# Altium PCB PCB3.PcbDoc
Units mil, origin at the board's own origin, x right, y up, seen from the top; angles counter-clockwise.
Board outline 4724 x 3937 mil, 2 copper layers (Top Layer, Bottom Layer); 59 components, 93 nets, 309 pads, 46 vias.
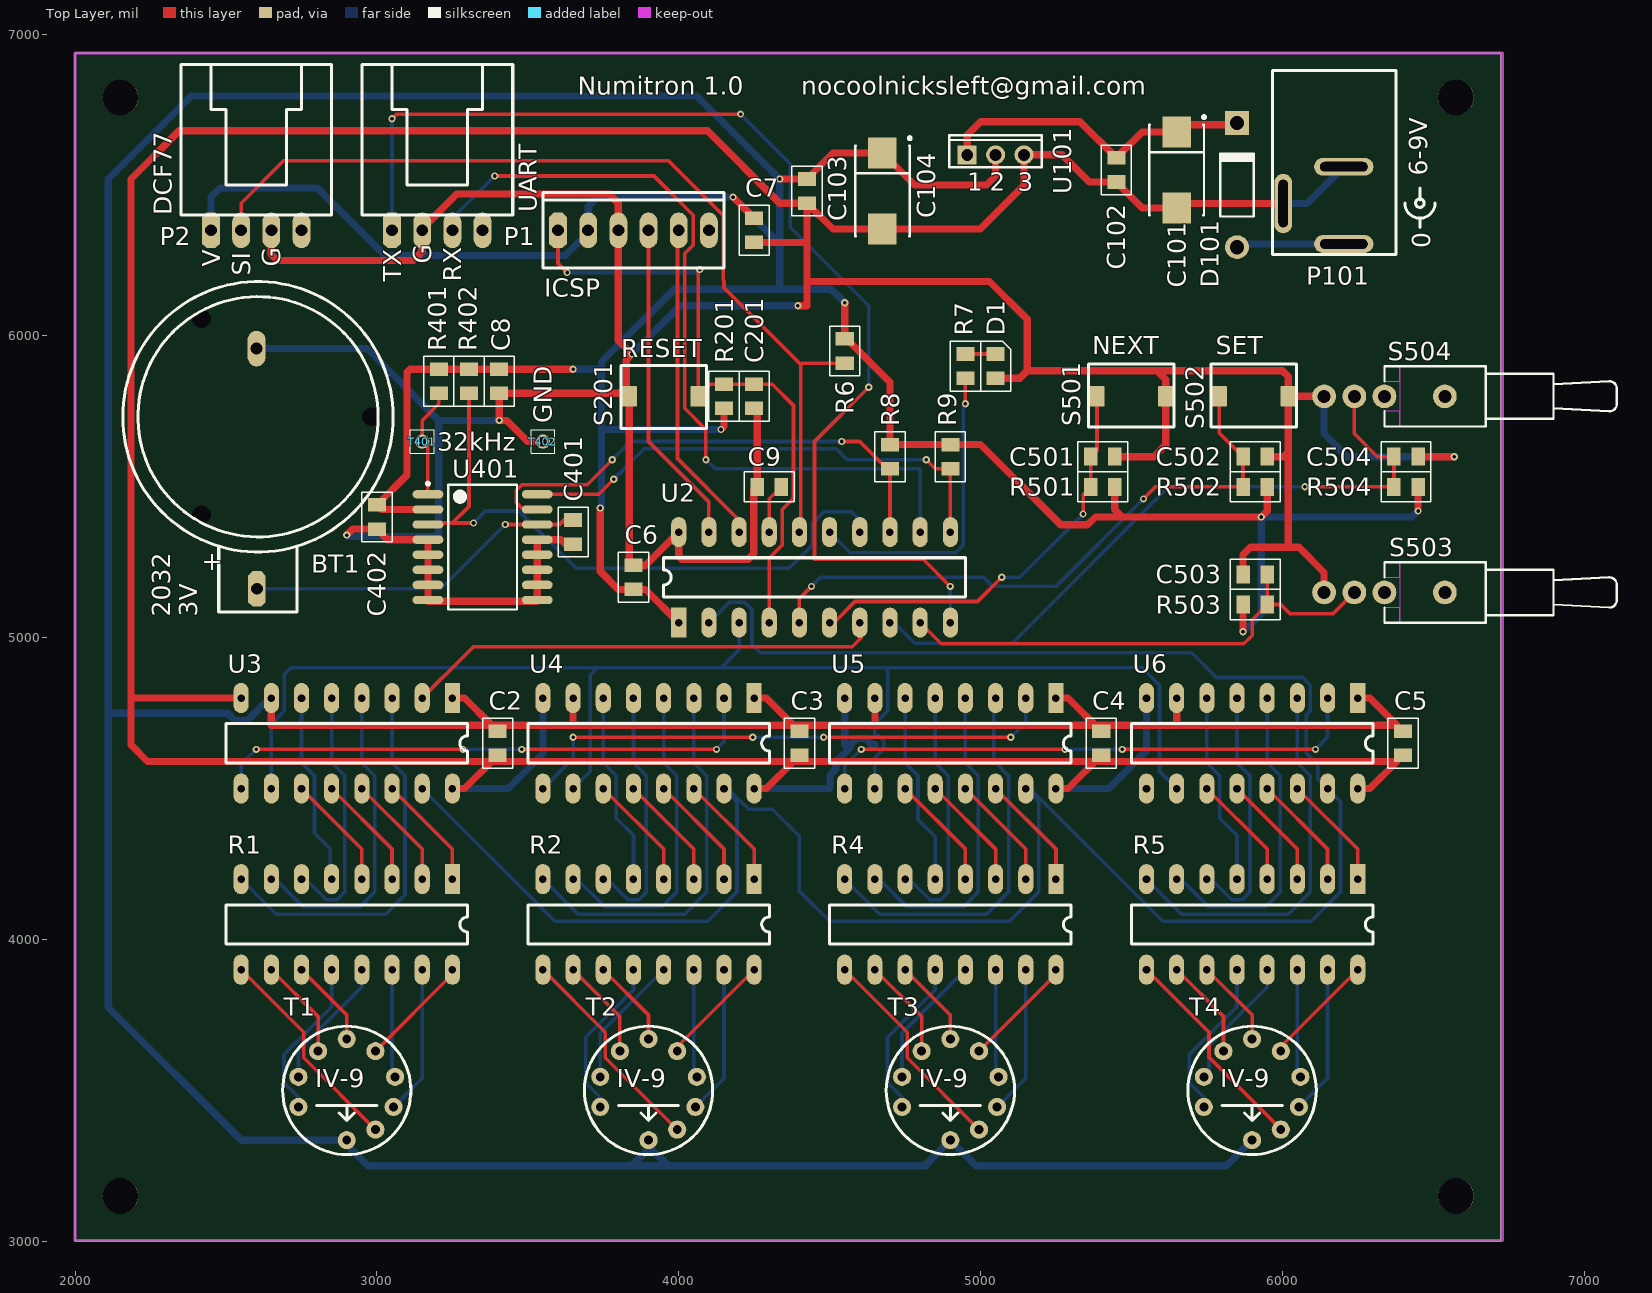
[diagram p0: Top Layer view]
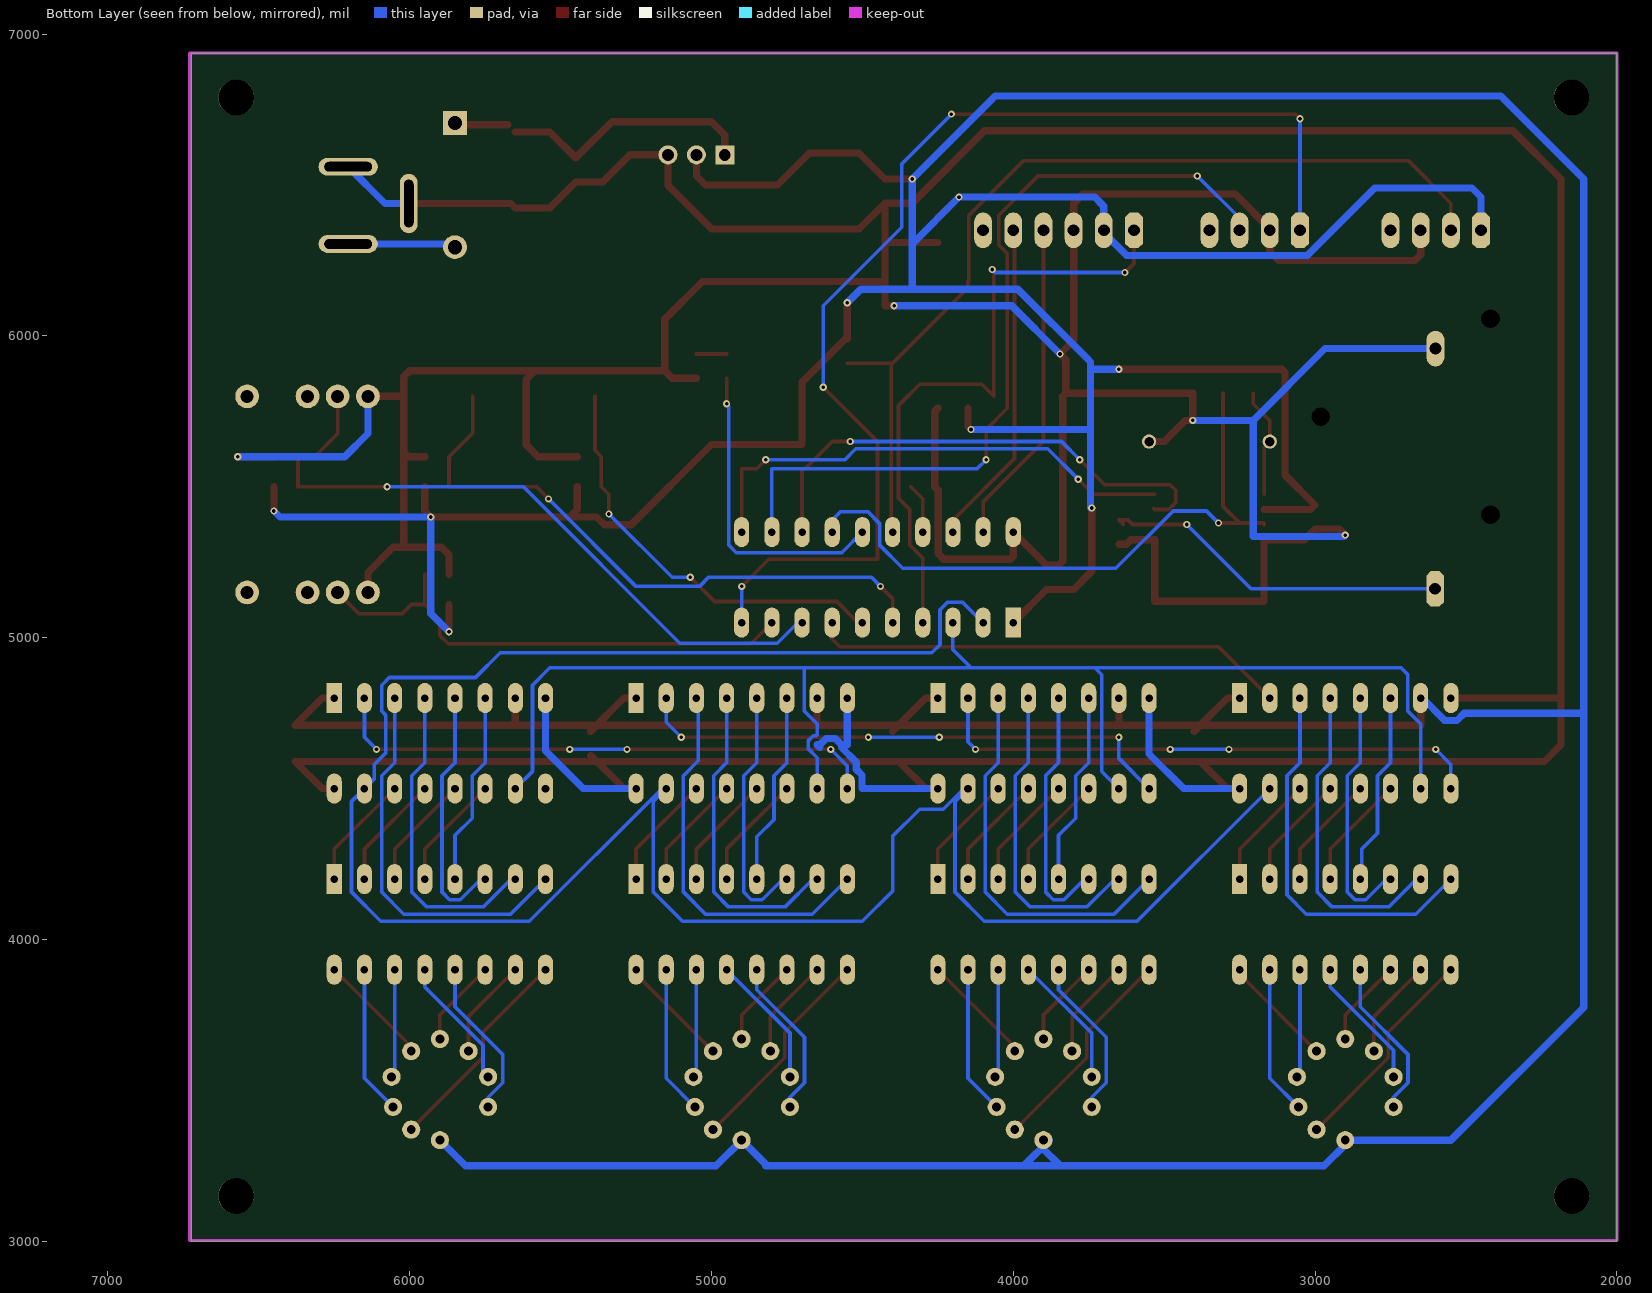
[diagram p1: Bottom Layer view, seen from below]

## Layer stack, top to bottom
Top Layer: signal copper 1.4
Dielectric: dielectric 12.6, FR-4, Dk 4.8
Bottom Layer: signal copper 1.4

## Board outline
2000,3000 6724,3000 6724,6937 2000,6937

## Design rules (kind name [scope] priority, off if disabled: settings)
Clearance [All] p1: gap=12
Height [All] p1: minheight=0 maxheight=2000 prefheight=500
PolygonConnect [All] p1: connectstyle=Relief reliefconductorwidth=10 reliefentries=4 polygonreliefangle="90 Angle"
RoutingVias [All] p1: holewidth=12 width=24 viastyle="Through Hole" minholewidth=12 minwidth=24 maxholewidth=28 maxwidth=50
SilkscreenOverComponentPads [All] p1: minsilkscreentomaskgap=10
SolderMaskExpansion [All] p1: expansion=4
Width Width_Power [InNetClass('Power')] p1: maxlimit=48 minlimit=24 preferedwidth=24
Width [All] p2: maxlimit=12 minlimit=12 preferedwidth=12
26 further rules are at their usual default settings.

## Classes and differential pairs
net class Power: GND NetC101_1 NetD101_1 VCC
component class RTC: BT1 C401 C402 R401 R402 T401 T402 U401
component class "Power Supply": C101 C102 C103 C104 D101 P101 U101
component class Main: C2 C3 C4 C5 C6 C7 C8 C9 D1 P1 P2 R1 R2 R4 R5 R6 R7 R8 R9 T1 T2 T3 T4 U2 U3 U4 U5 U6
component class ICSP: C201 ICSP R201 S201
component class Buttons: C501 C502 C503 C504 R501 R502 R503 R504 S501 S502 S503 S504

## Components (designator, comment, footprint, x,y, rotation, side; value= is the part's Value field where it differs from the comment)
BT1 "Battery" 2032HOLDER 2600,5050 r270 top
C2 "Cap Semi" "RCL 0805" 3400,4650 r90 top
C3 "Cap Semi" "RCL 0805" 4400,4650 r90 top
C4 "Cap Semi" "RCL 0805" 5400,4650 r90 top
C5 "Cap Semi" "RCL 0805" 6400,4650 r90 top
C6 "Cap Semi" "RCL 0805" 3850,5200 r270 top
C7 "Cap Semi" "RCL 0805" 4250,6350 r90 top
C8 "Cap Semi" "RCL 0805" 3405,5850 r90 top
C9 "Cap Semi" "RCL 0805" 4300,5500 r0 top
C101 "Cap Pol1" Tantalum_D 5650,6550 r270 top
C102 "Cap Semi" "RCL 0805" 5450,6550 r90 top
C103 "Cap Semi" "RCL 0805" 4425,6480 r90 top
C104 "Cap Pol1" Tantalum_D 4675,6480 r270 top
C201 "Cap Semi" "RCL 0805" 4250,5800 r90 top
C401 "Cap" "RCL 0805" 3650,5350 r90 top
C402 "Cap" "RCL 0805" 3000,5400 r90 top
C501 "Cap Semi" "RCL 0805" 5405,5600 r180 top
C502 "Cap Semi" "RCL 0805" 5910,5600 r180 top
C503 "Cap Semi" "RCL 0805" 5910,5210 r0 top
C504 "Cap Semi" "RCL 0805" 6410,5600 r180 top
D1 "LED2" "RCL 0805 POL" 5050,5900 r270 top
D101 "Diode 1N4004" DIO10.46-5.3x2.8 5850,6500 r90 top
ICSP "Header 6" "MOLEX 22-23-2061" 3850,6350 r0 top
P1 "Serial Debug Connector" "PC Audio Connector" 3200,6350 r0 top
P2 "DCF Connector" "PC Audio Connector" 2600,6350 r0 top
P101 "PWR2.5" "Power Jack 6mm" 6200,6600 r90 top
R1 "Res Pack3" DIP16 3250,4200 r270 top locked
R2 "Res Pack3" DIP16 4250,4200 r270 top locked
R4 "Res Pack3" DIP16 5250,4200 r270 top locked
R5 "Res Pack3" DIP16 6250,4200 r270 top locked
R6 "Res3" "RCL 0805" 4550,5950 r270 top
R7 "Res3" "RCL 0805" 4950,5900 r90 top
R8 "I2C SDA PULLUP" "RCL 0805" 4700,5600 r90 top
R9 "I2C SCL PULLUP" "RCL 0805" 4900,5600 r90 top
R201 "Res3" "RCL 0805" 4150,5800 r270 top
R401 "Res Semi" "RCL 0805" 3205,5850 r90 top
R402 "Res Semi" "RCL 0805" 3305,5850 r90 top
R501 "ERA6Y" "RCL 0805" 5405,5500 r0 top
R502 "ERA6Y" "RCL 0805" 5910,5500 r0 top
R503 "ERA6Y" "RCL 0805" 5910,5110 r180 top
R504 "ERA6Y" "RCL 0805" 6410,5500 r0 top
S201 "Reset Switch" "Square SMD Switch 01" 3950,5800 r0 top
S501 "SW-PB" "Square SMD Switch 01" 5500,5800 r180 top
S502 "SW-PB" "Square SMD Switch 01" 5905.51,5800 r180 top
S503 "SW-SPDT" TL36WW15050 6338.58,5150 r0 top
S504 "SW-SPDT" TL36WW15050 6338.58,5800 r0 top
T1 "IV-9" IV-9 2900,3500 r0 top locked
T2 "IV-9" IV-9 3900,3500 r0 top locked
T3 "IV-9" IV-9 4900,3500 r0 top locked
T4 "IV-9" IV-9 5900,3500 r0 top locked
T401 "TESTPOINT" "TEST POINT 1" 3150,5650 r90 top
T402 "TESTPOINT" "TEST POINT 1" 3550,5650 r90 top
U2 "PIC18F14K50-I/P" DIP20 4000,5050 r90 top locked
U3 "TPIC6C596" DIP16 3250,4800 r270 top locked
U4 "TPIC6C596" DIP16 4250,4800 r270 top locked
U5 "TPIC6C596" DIP16 5250,4800 r270 top locked
U6 "TPIC6C596" DIP16 6250,4800 r270 top locked
U101 "L7805ABV" SFM-F3 5050,6600 r0 top
U401 "DS3231" WSO16_M 3350,5300 r0 top locked

## Footprints (in the part's own frame and the unit in brackets; to place one, negate y for a bottom-side part, rotate by r counter-clockwise, add the part's x,y. Pads: shape width x height; smd on the part's side, far side on the other; paste and mask are expansions set on the pad)
2032HOLDER [mm] "Keystone Electronics - Cat No 103 - 20mm Lithium Coin Cell Battery Holder"
  oct 3x1.5 hole 1: 1(-2.846,0.051)
  oval 3x1.5 hole 1: 2(-23.063,0.024)
  round 1.2 hole 1.575 unplated: ""(-25.572,-4.615) ""(-17.323,9.673) ""(-9.074,-4.615)
  silkscreen extent -28.7,-11.23 -0.89,11.53, body extent -28.72,-11.19 -0.87,11.52, height 6
DIO10.46-5.3x2.8 [mm] "Diode, Axial; Body 5.2 x 2.7 mm (LxDia. max), Lead Dia. 0.86 mm (max)"
  round 2 hole 1.2: 1(-5.23,0)
  rect 2x2 hole 1.2: 2(5.23,0)
  silkscreen extent -2.65,-1.4 2.75,1.4, body extent -5.5,-1.2 5.2,1.2, height 2.59
DIP16 [mil]
  rect 100x50 hole 25: 1(0,0)
  oval 100x50 hole 25: 2(0,-100) 3(0,-200) 4(0,-300) 5(0,-400) 6(0,-500) 7(0,-600) 8(0,-700) 9(300,-700) 10(300,-600) 11(300,-500) 12(300,-400) 13(300,-300) 14(300,-200) 15(300,-100) 16(300,0)
  silkscreen extent 85,-750 215,50, body extent 0,-748 295,59, height 100
DIP20 [mil]
  rect 100x50 hole 25: 1(0,0)
  oval 100x50 hole 25: 2(0,-100) 3(0,-200) 4(0,-300) 5(0,-400) 6(0,-500) 7(0,-600) 8(0,-700) 9(0,-800) 10(0,-900) 11(300,-900) 12(300,-800) 13(300,-700) 14(300,-600) 15(300,-500) 16(300,-400) 17(300,-300) 18(300,-200) 19(300,-100) 20(300,0)
  silkscreen extent 85,-950 215,50, body extent 0,-953 303,59, height 100
IV-9 [mil] "Russian Numitron Display Tube"
  round 60 hole 29.53: 1(0,-165) 2(95,-130) 3(155,-55) 4(160,45) 5(95,130) 6(0,170) 7(-95,130) 8(-160,45) 9(-160,-55)
  silkscreen extent -213,-213 213,213, body extent -213,-213 211,212, height 1181
"MOLEX 22-23-2061" [mm] "2.54mm (.100\") Pitch KK® Solid Header, Vertical, with Friction Lock, 2 Circuits, Tin (Sn) Plating"
  oct 1.5x3 hole 1: 1(-6.35,0)
  oval 1.5x3 hole 1: 2(-3.81,0) 3(-1.27,0) 4(1.27,0) 5(3.81,0) 6(6.35,0)
  silkscreen extent -7.62,-3.17 7.62,3.17, body extent -7.62,-3.17 7.62,3.18, height 10.66
"PC Audio Connector" [mm]
  oct 1.5x3 hole 1: 1(-3.81,0)
  oval 1.5x3 hole 1: 2(-1.27,0) 3(1.27,0) 4(3.81,0)
  silkscreen extent -6.35,1.27 6.35,13.97, body extent -6.35,1.27 6.35,13.97, height 4
"Power Jack 6mm" [mm]
  oval 1.5x5 hole 0.8 slot 4 at 90 deg: 1(-7.5,-0.1) 3(-1,-0.1)
  oval 5x1.5 hole 0.8 slot 4 at 0 deg: 2(-4.1,5)
  silkscreen extent -8.4,-4.5 7.1,5.9, body extent -7.1,-4.6 7.2,4.1, height 11
"RCL 0805" [mil]
  rect 45x60 smd: 1(-40,0) 2(40,0)
  silkscreen extent -82,-50 82,50, body extent -50,-30 50,30, height 31
"RCL 0805 POL" [mil]
  rect 45x60 smd: 1(-40,0) 2(40,0)
  silkscreen extent -82,-50 83,50, body extent -50,-30 50,30, height 31
SFM-F3 [mm] "SIP with Mounting Hole; 3 Leads; Body 11 x 7.6 x 2.5 mm (typ); Pitch 2.39 mm"
  rect 1.6x1.6 hole 1: 1(-2.39,0)
  round 1.6 hole 1: 2(0,0) 3(2.39,0)
  silkscreen extent -3.9,-1.05 3.9,1.65, body extent -3.8,-1 3.8,1.5, height 15
"Square SMD Switch 01" [mm]
  rrect10% 1.3x1.7 smd: 1(-2.9,0) 2(2.9,0)
  silkscreen extent -3.6,-2.7 3.6,2.6, body extent -3.3,-2.5 3.3,2.4, height 4
Tantalum_D [mm] "Capacitor, SM Tantalum; Body 7.3 x 4.3 mm (LxW typ)"
  rect 2.6x2.4 smd: 1(-3.2,0) 2(3.2,0)
  silkscreen extent -4.57,-2.3 3.8,2.43, body extent -3.8,-2.3 3.8,2.2, height 4
"TEST POINT 1" [mm]
  round 1.2 hole 0.8: 1(0,0)
  silkscreen extent -1,-1 1,1
TL36WW15050 [mm]
  round 2 hole 1.1: 1(0,0) 2(-2.54,0) 3(-5.08,0) M(5.08,0)
  Top Layer keep-out region: 1.27,2.54 1.27,-2.54 8.509,-2.54 8.509,2.54
  Top Layer keep-out region: 0,2.54 0,1.27 1.27,1.27 1.27,2.54
  Top Layer keep-out region: 0,-1.27 0,-2.54 1.27,-2.54 1.27,-1.27
  silkscreen extent 0,-2.54 19.56,2.54, body extent -5.1,-2.4 19.2,2.4, height 9
WSO16_M [mm] "16-Pin Small Outline Integrated Circuit 1.27 mm Pitch, IPC Low Density"
  oval 2.6x0.7 smd: 1(-4.6,4.445) 2(-4.6,3.175) 3(-4.6,1.905) 4(-4.6,0.635) 5(-4.6,-0.635) 6(-4.6,-1.905) 7(-4.6,-3.175) 8(-4.6,-4.445) 9(4.6,-4.445) 10(4.6,-3.175) 11(4.6,-1.905) 12(4.6,-0.635) 13(4.6,0.635) 14(4.6,1.905) 15(4.6,3.175) 16(4.6,4.445)
  silkscreen extent -4.72,-5.25 2.9,5.47, body extent -3.75,-5.25 3.75,5.25, height 2.65

## Part data
BT1: "Multicell Battery"
C2 C3 C4 C5 C6 C7 C8 C9 C102 C103 C201 C501 C502 C503 C504: "Capacitor (Semiconductor SIM Model)"
C101 C104: "Polarized Capacitor (Radial)"
C401 C402: "Capacitor"
D1: "Typical RED, GREEN, YELLOW, AMBER GaAs LED"
D101: "1 Amp General Purpose Rectifier"
ICSP: "Header, 6-Pin"
P1 P2: library part "Header 4", "Header, 4-Pin"
P101: "Low Voltage Power Supply Connector"
R1 R2 R4 R5: "Isolated Resistor Network"
R6 R7 R201: "Resistor"
R8 R9: library part Res3, "Resistor"
R401 R402: "Semiconductor Resistor"
R501 R502 R503 R504: "Rectangular Thick Film Chip Resistor, 10 Ohm to 1M Ohm Range, 0.1% and 0.5% Tolerance, 0805 Size, 0.1 W"
S201: library part SW-PB, "Switch"
S501 S502: "Switch"
S503 S504: "SPDT Subminiature Toggle Switch, Right Angle Mounting, Vertical Actuation"
U2: "USB Flash Microcontroller with nanoWatt XLP Technology, 20-pin PDIP, Industrial Temperature"
U101: "Precision 1A Regulator"
U401: "Extremely Accurate I²C-Integrated RTC/TCXO/Crystal"

## Free pads (board coordinates)
  round 118.11 hole 118.11 unplated: 6(2150,6790) 7(2150,3150) 8(6575,3150) 9(6575,6790)

## Via types
v1: diameter 24, hole 12, Top Layer to Bottom Layer, 46 vias

## Nets (pads, with @x,y where several pads share a name; then routed paths per layer and width w, separated by ;. In a path a pad name is that pad's centre, name@x,y a point inside that pad or via, vN(x,y) a via of type N, cw(c..) or ccw(c..) an arc to the next point about the centre after c; other vN are vias at no path point)
32KHZ: R401.1 T401.1 U401.1 | length 365.6
  Top Layer w12: U401.1 3168.9,5631.1 T401.1 3150,5720 3205,5775 R401.1
BTNXT: C501.2 R501.1 S501.2 U2.6 | length 1398.1
  Top Layer w12: U2.6 4514.19,5050 4584.19,5120 4990,5120 v1(5070,5200) ; v1(5340,5410) 5340,5475 R501.1 C501.2 5385.83,5620.83 S501.2
  Bottom Layer w12: v1(5070,5200) 5130,5200 v1(5340,5410)
BTSET: C502.2 R502.1 S502.2 U2.5 | length 2060.7
  Top Layer w12: U2.5 4400,5130 v1(4440,5170) ; v1(5540,5460) 5580,5500 R502.1 C502.2 5791.34,5678.66 S502.2
  Bottom Layer w12: v1(4440,5170) 4470,5200 5010,5200 5040,5170 5250,5170 v1(5540,5460)
DATA: U2.7 U3.2 | length 1699
  Top Layer w12: U3.2@3143,4793 3207,4857 3207,4857.46 3217.54,4868 ; U3.2 3150,4800.46 3217.54,4868 ; U2.7 4600,5000 4605,5000 4575,4970 3320,4970 3218,4868 3217.54,4868
DCFSIG: P2.2 R6.2 U2.16 | length 3121.8
  Top Layer w12: P2.2 2550,6440 2690,6580 3966.74,6580 4147.53,6399.21 4147.53,6183.42 ; 4150,6180.94 4150,6160 4404.5,5905.5 ; U2.16 4404.5,5354.5 4404.5,5905.5 ; R6.2 4409,5910 4404.5,5905.5
DEBLED: R7.1 U2.15 | length 1037.3
  Top Layer w12: v1(4950,5775) R7.1
  Bottom Layer w12: U2.15 4568,5282 4917.81,5282 4943,5307.19 4943,5768 v1(4950,5775)
GND: BT1.2 C2.1 C3.1 C4.1 C5.1 C6.1 C7.1 C8.1 C9.1 C101.2 C102.1 C103.1 C104.2 C201.1 C401.1 C402.1 C501.1 C502.1 C503.1 C504.1 D1.2 ICSP.3 P1.2 P2.3 P101.2 P101.3 S201.1 S501.1 S502.1 S503.3 S504.3 T402.1 U2.20 U3.8 U3.16 U4.8 U4.16 U5.8 U5.16 U6.8 U6.16 U101.3 U401.4 U401.5 U401.6 U401.7 U401.8 U401.9 U401.10 U401.11 U401.12 U401.13 | length 26006.5
  Top Layer w12: U401.8 3168.9,5121.1 U401.8@3172.8,5125 ; U401.9@3531.1,5121.1 U401.9
  Top Layer w24: 2400,4800 2390,4800 ; U3.8 2390,4800 ; P2.3 2650,6270 2670,6250 3120,6250 3140,6270 ; v1(2900,5340) 2920,5360 C402.1 3035,5325 U401.4 U401.5 U401.6 U401.7 U401.8 ; 3030,6680 2345,6680 2185,6520 2185,4800 ; 3039.09,6680 4095,6680 4335,6440 C103.1 ; 3136.95,6266.94 3140,6270 ; U401.8@3168.9,5121.1 U401.9@3531.1,5121.1 ; U3.16 3290,4500 C2.1@3380,4590 ; v1(3405,5720) C8.1 3825.83,5810 3825.83,5920.83 v1(3845,5940) 3800,5985 ICSP.3 3800,6440 3770,6470 3264.77,6470 3150,6355.23 P1.2 3150,6280 3140,6270 ; v1@3410,5720 3430,5720 3500,5650 T402.1 ; U401.9 U401.10 U401.11 U401.12 U401.13 3610,5325 3625,5310 C401.1 ; S201.1 3835.83,5254.17 C6.1 3890,5240 U2.20 4000,5270 4010,5260 4230,5260 4249,5279 4249,5489 C9.1 4260,5750 C201.1 ; U4.16 4290,4500 C3.1@4380,4590 ; C7.1 4425,6310 ; v1(4395,6100) 4425,6100 4425,6180 ; D1.2 5130,5860 5155,5885 ; U5.16 5290,4500 C4.1 ; C501.1 5575,5600 5614.17,5639.17 S501.1 5614.17,5855.83 5585,5885 ; C503.1 5870,5275 5895,5300 6020,5300 ; C502.1 6005,5600 6019.69,5614.69 ; P101.2 5664.57,6438.58 C101.2 5535.98,6424.02 C102.1 5360,6510 5270,6600 U101.3 5144.09,6499.09 4999.02,6354.02 C104.2 4510.98,6354.02 C103.1 ; S503.3 6138.58,5216.42 6055,5300 6020,5300 ; S504.3 S502.1 ; U6.16 6290,4500 6380,4590 2240,4590 2185,4645 2185,4800 ; C504.1 v1(6570,5600) ; 2185,4800 2390,4800 ; 4425,6180 5030,6180 5155,6055 5155,5885 ; 4425,6180 4425,6310 ; 4425,6310 C103.1 ; 5155,5885 5585,5885 ; 5585,5885 6000,5885 6019.69,5865.31 S502.1 ; 6019.69,5614.69 S502.1 ; 6019.69,5614.69 6019.69,5300.31 6020,5300
  Bottom Layer w24: U3.8 U3.8@2555.7,4800 ; BT1.2@2600,5958 BT1.2 2967,5958 3205,5720 ; v1(2900,5340) 2905,5335 3205,5335 3205,5720 ; U3.16 3435,4500 3550,4615 U4.8 U4.8@3555.7,4800 ; v1(3405,5720) 3205,5720 ; v1(3845,5940) 4005,6100 v1(4395,6100) ; U4.16@4240,4500 4501,4500 4501,4545.3 4520,4564.3 4520,4587.43 4569,4636.43 4569,4644.91 4590.09,4666 4619.91,4666 4641,4644.91 4641,4636 4650,4645 ; 4550,4645 U5.8 U5.8@4555.7,4800 ; U5.16 5425,4500 5550,4625 U6.8 ; P101.2 6081.89,6438.58 P101.3 ; S504.3 6138.58,5676.42 6215,5600 v1(6570,5600)
MCLR: C201.2 ICSP.1 R201.1 S201.2 U2.4 | length 2133.9
  Top Layer w12: ICSP.1 3600,6240 v1(3630,6210) ; v1(4070,6220) 4064.17,6214.17 S201.2 4104.17,5840 R201.1 C201.2 4310,5840 4380.5,5769.5 4380.5,5462.54 4343,5425.04 4343,5307.19 4300,5264.19 U2.4
  Bottom Layer w12: v1(3630,6210) 4060,6210 v1(4070,6220)
NetC9_2: C9.2 U2.17 | length 166.6
  Top Layer w12: U2.17 4300,5460 C9.2
NetC101_1: C101.1 C102.2 D101.2 U101.1 | length 1052.1
  Top Layer w24: U101.1@4974.35,6600 U101.1 4955.91,6665.91 5000,6710 5330,6710 C102.2 5535.98,6675.98 C101.1 ; C101.1@5674.02,6700 D101.2@5844.09,6700
NetD1_1: D1.1 R7.2 | length 100
  Top Layer w12: R7.2 D1.1
NetD101_1: D101.1 P101.1 | length 358.3
  Bottom Layer w24: D101.1 5860.63,6304.72 P101.1
NetR1_1: R1.1 U3.14 | length 382.8
  Top Layer w12: U3.14 3250,4300 R1.1
NetR1_2: R1.2 U3.13 | length 382.8
  Top Layer w12: U3.13 3150,4300 R1.2
NetR1_3: R1.3 U3.12 | length 382.8
  Top Layer w12: U3.12 3050,4300 R1.3
NetR1_4: R1.4 U3.11 | length 382.8
  Top Layer w12: U3.11 2950,4300 R1.4
NetR1_5: R1.5 U3.6 | length 641.4
  Bottom Layer w12: U3.6 2750,4585.81 2793,4542.81 2793,4352 2845,4300 2845,4205 R1.5
NetR1_6: R1.6 U3.5 | length 842.2
  Bottom Layer w12: R1.6 2764.19,4200 2832.19,4132 2867.81,4132 2893,4157.19 2893,4542.81 2850,4585.81 U3.5
NetR1_7: R1.7 U3.4 | length 1076.3
  Bottom Layer w12: R1.7 2664.19,4200 2756.19,4108 2943.81,4108 2993,4157.19 2993,4542.81 2950,4585.81 U3.4 U3.4@2935.81,4800
NetR1_8: R1.8 U3.3 | length 1301.6
  Bottom Layer w12: R1.8 2666,4084 3029,4084 3093,4148 3093,4542.81 3050,4585.81 U3.3 U3.3@3035.81,4800
NetR1_9: R1.9 T1.2 | length 714.3
  Top Layer w12: R1.9 2757,3693 2757,3608 T1.2
NetR1_10: R1.10 T1.7 | length 334.2
  Top Layer w12: R1.10 2805,3745 T1.7
NetR1_11: R1.11 T1.6 | length 292.1
  Top Layer w12: R1.11 2900,3750 T1.6
NetR1_12: R1.12 T1.9 | length 540.3
  Bottom Layer w12: T1.9 2740,3477.12 2692,3525.12 2692,3618.82 2850,3776.82 R1.12
NetR1_13: R1.13 T1.8 | length 466
  Bottom Layer w12: T1.8@2757,3562 T1.8 2740,3632.88 2950,3842.88 R1.13
NetR1_14: R1.14 T1.4 | length 359.1
  Bottom Layer w12: R1.14 3050,3555 T1.4
NetR1_15: R1.15 T1.3 | length 494.4
  Bottom Layer w12: T1.3 3150,3540 R1.15
NetR1_16: R1.16 T1.5 | length 375.6
  Top Layer w12: T1.5 3250,3885 R1.16
NetR2_1: R2.1 U4.14 | length 382.8
  Top Layer w12: U4.14 4250,4300 R2.1
NetR2_2: R2.2 U4.13 | length 382.8
  Top Layer w12: U4.13 4150,4300 R2.2
NetR2_3: R2.3 U4.12 | length 382.8
  Top Layer w12: U4.12 4050,4300 R2.3
NetR2_4: R2.4 U4.11 | length 382.8
  Top Layer w12: U4.11 3950,4300 R2.4
NetR2_5: R2.5 U4.6 | length 641.4
  Bottom Layer w12: U4.6 3750,4585.81 3793,4542.81 3793,4402 3850,4345 R2.5
NetR2_6: R2.6 U4.5 | length 842.2
  Bottom Layer w12: R2.6 3764.19,4200 3832.19,4132 3867.81,4132 3893,4157.19 3893,4542.81 3850,4585.81 U4.5
NetR2_7: R2.7 U4.4 | length 1062.1
  Bottom Layer w12: R2.7 3664.19,4200 3756.19,4108 3943.81,4108 3993,4157.19 3993,4542.81 3950,4585.81 U4.4
NetR2_8: R2.8 U4.3 | length 1282
  Bottom Layer w12: R2.8 3666,4084 4019.81,4084 4093,4157.19 4093,4542.81 4050,4585.81 U4.3
NetR2_9: R2.9 T2.2 | length 714.3
  Top Layer w12: R2.9 3757,3693 3757,3608 T2.2
NetR2_10: R2.10 T2.7 | length 334.2
  Top Layer w12: R2.10 3805,3745 T2.7
NetR2_11: R2.11 T2.6 | length 292.1
  Top Layer w12: R2.11 3900,3750 T2.6
NetR2_12: R2.12 T2.9 | length 540.3
  Bottom Layer w12: T2.9 3740,3477.12 3692,3525.12 3692,3675.94 3850,3833.94 R2.12
NetR2_13: R2.13 T2.8 | length 466.1
  Bottom Layer w12: T2.8@3733,3552 T2.8 3740,3690 R2.13 R2.13@3935.81,3900
NetR2_14: R2.14 T2.4 | length 359.1
  Bottom Layer w12: R2.14 4050,3555 T2.4
NetR2_15: R2.15 T2.3 | length 494.4
  Bottom Layer w12: T2.3 4150,3540 R2.15
NetR2_16: R2.16 T2.5 | length 420.6
  Top Layer w12: T2.5 3995,3645 R2.16
  Bottom Layer w12: R2.16@4250,3855 R2.16
NetR4_1: R4.1 U5.14 | length 382.8
  Top Layer w12: U5.14 5250,4300 R4.1
NetR4_2: R4.2 U5.13 | length 382.8
  Top Layer w12: U5.13 5150,4300 R4.2
NetR4_3: R4.3 U5.12 | length 382.8
  Top Layer w12: U5.12 5050,4300 5050,4256 R4.3
NetR4_4: R4.4 U5.11 | length 382.8
  Top Layer w12: U5.11 4950,4300 R4.4
NetR4_5: R4.5 U5.6 | length 641.4
  Bottom Layer w12: U5.6 4750,4585.81 4793,4542.81 4793,4397 4850,4340 R4.5
NetR4_6: R4.6 U5.5 | length 842.2
  Bottom Layer w12: R4.6 4764.19,4200 4832.19,4132 4867.81,4132 4893,4157.19 4893,4542.81 4850,4585.81 U5.5
NetR4_7: R4.7 U5.4 | length 1062.1
  Bottom Layer w12: R4.7 4664.19,4200 4756.19,4108 4943.81,4108 4993,4157.19 4993,4542.81 4950,4585.81 U5.4
NetR4_8: R4.8 U5.3 | length 1287.1
  Bottom Layer w12: R4.8 4666,4084 5019.81,4084 5093,4157.19 5093,4542.81 5043.81,4592 5043.81,4793.81 U5.3
NetR4_9: R4.9 T3.2 | length 714.3
  Top Layer w12: R4.9 4757,3693 4757,3608 T3.2
NetR4_10: R4.10 T3.7 | length 334.2
  Top Layer w12: R4.10 4805,3745 T3.7
NetR4_11: R4.11 T3.6 | length 292.1
  Top Layer w12: R4.11 4900,3750 T3.6
NetR4_12: R4.12 T3.9 | length 540.3
  Bottom Layer w12: T3.9 4740,3477.12 4692,3525.12 4692,3675.94 4850,3833.94 R4.12
NetR4_13: R4.13 T3.8 | length 466.1
  Bottom Layer w12: T3.8@4733,3552 T3.8 4740,3690 R4.13 R4.13@4935.81,3900
NetR4_14: R4.14 T3.4 | length 359.1
  Bottom Layer w12: R4.14 5050,3555 T3.4
NetR4_15: R4.15 T3.3 | length 494.4
  Bottom Layer w12: T3.3 5150,3540 R4.15
NetR4_16: R4.16 T3.5 | length 375.6
  Top Layer w12: T3.5 5250,3885 R4.16
NetR5_1: R5.1 U6.14 | length 382.8
  Top Layer w12: U6.14 6250,4300 R5.1
NetR5_2: R5.2 U6.13 | length 382.8
  Top Layer w12: U6.13 6150,4300 R5.2
NetR5_3: R5.3 U6.12 | length 382.8
  Top Layer w12: U6.12 6050,4300 R5.3
NetR5_4: R5.4 U6.11 | length 382.8
  Top Layer w12: U6.11 5950,4300 R5.4
NetR5_5: R5.5 U6.6 | length 641.4
  Bottom Layer w12: U6.6 5750,4585.81 5793,4542.81 5793,4402 5850,4345 R5.5
NetR5_6: R5.6 U6.5 | length 842.2
  Bottom Layer w12: R5.6 5764.19,4200 5832.19,4132 5867.81,4132 5893,4157.19 5893,4542.81 5850,4585.81 U6.5
NetR5_7: R5.7 U6.4 | length 1062.1
  Bottom Layer w12: R5.7 5664.19,4200 5756.19,4108 5943.81,4108 5993,4157.19 5993,4542.81 5950,4585.81 U6.4
NetR5_8: R5.8 U6.3 | length 1282
  Bottom Layer w12: R5.8 5666,4084 6019.81,4084 6093,4157.19 6093,4542.81 6050,4585.81 U6.3
NetR5_9: R5.9 T4.2 | length 714.3
  Top Layer w12: R5.9 5757,3693 5757,3610.12 5995,3372.12 T4.2
NetR5_10: R5.10 T4.7 | length 334.2
  Top Layer w12: R5.10 5805,3745 T4.7
NetR5_11: R5.11 T4.6 | length 292.1
  Top Layer w12: R5.11 5900,3750 T4.6
NetR5_12: R5.12 T4.9 | length 540.3
  Bottom Layer w12: T4.9 5740,3477.12 5692,3525.12 5692,3618.82 5850,3776.82 R5.12
NetR5_13: R5.13 T4.8 | length 466.1
  Bottom Layer w12: T4.8@5733,3552 T4.8 5757,3562 5757,3649.88 5950,3842.88 R5.13 R5.13@5935.81,3900
NetR5_14: R5.14 T4.4 | length 359.1
  Bottom Layer w12: R5.14 6050,3555 T4.4
NetR5_15: R5.15 T4.3 | length 494.4
  Bottom Layer w12: T4.3 6150,3540 R5.15
NetR5_16: R5.16 T4.5 | length 375.6
  Top Layer w12: T4.5 5995,3645 R5.16
NetU3_9: U3.9 U4.2 | length 1856.1
  Top Layer w12: v1(2600,4630) v1(3285,4630) ; v1(3480,4630) v1(4125,4630)
  Bottom Layer w12: U3.9 2550,4580 v1(2600,4630) ; v1(3285,4630) v1(3480,4630) ; v1(4125,4630) 4150,4655 U4.2
NetU4_9: U4.9 U5.2 | length 1826.3
  Top Layer w12: v1@3655,4670 v1(4245,4670) ; v1(4480,4670) v1(5100,4670)
  Bottom Layer w12: U4.9 3650,4600 v1(3650,4670) ; v1@4240,4670 v1(4480,4670) ; v1(5100,4670) 5150,4720 U5.2 U5.2@5135.81,4800
NetU5_9: U5.9 U6.2 | length 1844.4
  Top Layer w12: v1(4605,4630) v1(5280,4630) ; v1(5470,4630) v1(6110,4630)
  Bottom Layer w12: U5.9 4550,4575 v1(4605,4630) ; v1(5280,4630) v1(5470,4630) ; v1(6110,4630) 6150,4670 U6.2
PGC: ICSP.5 U2.18 | length 1086.2
  Top Layer w12: ICSP.5 3996,6346 3996,5593.6 4200,5389.6 U2.18
PGD: ICSP.4 U2.19 | length 1082.8
  Top Layer w12: ICSP.4 3900,5650 4100,5450 U2.19
PGM: ICSP.6
RCK: U2.3 U3.10 U4.10 U5.10 U6.10 | length 4744.8
  Bottom Layer w12: U3.10 2650,4714.19 2693,4757.19 2693,4878 2715,4900 5535.81,4900 5593,4842.81 5593,4557 U6.10 ; U4.10 3707,4557 3707,4877 3730,4900 ; 4145,4905 4200,4960 U2.3 ; U5.10 4650,4602.57 4680,4632.57 4680,4657.43 4662.43,4675 4653.34,4675 4650,4678.34 4650,4714.19 4693,4757.19 4693,4898 4691,4900
RTCINT: R402.1 U2.14 U401.3 | length 2150.6
  Top Layer w12: U401.3 U401.3@3170,5375 ; U401.3@3170,5380 3250,5380 ; R402.1 3305,5435 3250,5380 ; v1(3320,5380) 3250,5380
  Bottom Layer w12: v1(3320,5380) 3360,5420 3470,5420 3660,5230 4365.81,5230 4443,5307.19 4443,5378.81 4482.09,5417.91 4482.19,5418 4572,5418 4600,5390 U2.14
RX: P1.3 U2.12 | length 2733.3
  Top Layer w12: v1(3390,6530) 3918.31,6530 4048.31,6400 4047.53,6399.21 4047.53,6300.79 4020,6273.26 4020,5760 4090,5690 v1(4090,5590)
  Bottom Layer w12: P1.3 3250,6390 v1(3390,6530) ; v1(4090,5590) 4120,5560 4700,5560 4800,5560 U2.12
SCL: R9.1 U2.11 U401.16 | length 1665.2
  Top Layer w12: U401.16 3735,5475 v1(3785,5525) ; v1(4820,5590) 4850,5560 R9.1 U2.11
  Bottom Layer w12: v1@3787.5,5527.5 3886,5626 4521.57,5626 4557.57,5590 v1(4820,5590)
SDA: R8.1 U2.13 U401.15 | length 1676.2
  Top Layer w12: U401.15@3534.6,5428.5 U401.15 3485,5425 3461.92,5448.08 3461.92,5488.16 3480.54,5506.78 3696.78,5506.78 v1(3780,5590) ; v1(4540,5650) 4600,5650 4690,5560 R8.1 U2.13
  Bottom Layer w12: v1(3780,5590) 3840,5650 v1(4540,5650)
SRCK: U2.2 U3.15 U4.15 U5.15 U6.15 | length 7685.5
  Top Layer w12: U2.2@4100,5049.54 U2.2
  Bottom Layer w12: U3.15 3590,4060 4095.81,4060 4193,4157.19 4193,4457 U4.15 4164.19,4500 4232.19,4432 4310,4432 4400,4342 4400,4160 4500,4060 4610,4060 ; U2.2@4114.19,5050 U2.2 4168,5118 4217.81,5118 4243,5092.81 4243,4977 4270,4950 5679.81,4950 ; 4604.19,4060 4610,4060 ; 5580,4950 5700,4950 5782,4868 6067.81,4868 6093,4842.81 6093,4757.19 6080,4744.19 6080,4617.57 6117,4580.57 6117,4533 U6.15 6193,4457 6193,4157.19 6095.81,4060 5604.19,4060 5164.19,4500 U5.15 5193,4457 5193,4157.19 5095.81,4060 4610,4060
SWDEB: C504.2 R504.1 S504.2 U2.8 | length 2299.4
  Top Layer w12: v1(6075,5500) R504.1 C504.2 6315,5600 6238.58,5676.42 S504.2
  Bottom Layer w12: U2.8 4714.19,5050 4782.19,4982 5105,4982 5623,5500 v1(6075,5500)
SWROT: C503.2 R503.1 S503.2 U2.9 | length 1693.6
  Top Layer w12: U2.9 4870,4980 5872.43,4980 5900,5007.57 5900,5060 R503.1 ; C503.2 R503.1 ; S503.2 6168.58,5080 6025,5080 5995,5110 R503.1
TX: P1.1 U2.10 | length 3864
  Top Layer w12: v1(3050,6720) 3065,6735 v1(4205,6735) ; v1(4630,5830) 4450,5650 4450,5260 4809.81,5260 v1(4899.81,5170)
  Bottom Layer w12: P1.1 v1(3050,6720) ; v1(4205,6735) 4370,6570 4370,6360 4630,6100 v1(4630,5830) ; v1(4899.81,5170) 4899.81,5050.19 U2.10
VBAT: BT1.1 C401.2 U401.14 | length 1165.6
  Top Layer w12: v1(3425,5375) U401.14 3605,5375 3620,5390 C401.2 C401.2@3635,5375
  Bottom Layer w12: BT1.1@2600,5162.06 3212.06,5162.06 v1(3425,5375)
VCC: C2.2 C3.2 C4.2 C5.2 C6.2 C7.2 C8.2 C103.2 C104.1 C402.2 ICSP.2 P2.1 R6.1 R8.2 R9.2 R201.2 R401.2 R402.2 R501.2 R502.2 R503.2 R504.2 T1.1 T2.1 T3.1 T4.1 U2.1 U3.1 U3.7 U4.1 U4.7 U5.1 U5.7 U6.1 U6.7 U101.2 U401.2 | length 25839.8
  Top Layer w24: U3.7 2650,4710 C2.2@3380,4710 ; U401.2 3015,5425 C402.2 3100,5540 3100,5880 3110,5890 R401.2 ; R401.2@3198.56,5890 R401.2 ; U3.1 3290,4800 C2.2@3380,4710 ; C2.2 C2.2@3380,4710 ; U4.7 3650,4715 3645,4710 ; v1(3650,5890) C8.2 R402.2 R401.2 ; v1(3740,5430) 3740,5220 3800,5160 C6.2 3860,5160 3890,5160 U2.1 ; v1(4140,5690) 4150,5700 R201.2 ; v1(4180,6460) C7.2 C7.2@4250,6393.61 ; 4230,4710 4750,4710 ; U4.1 4290,4800 C3.2@4380,4710 ; v1(4335,6520) C103.2 ; C3.2 C3.2@4380,4710 ; C103.2@4421.39,6520 C103.2 ; v1(4550,6110) R6.1 4556.44,5990 4700,5846.44 R8.2 R9.2 5000,5640 5266,5374 5354.91,5374 5380.91,5400 5470,5400 ; U5.7 4650,4710 5650,4710 ; U101.2 5050,6530 5020,6500 4780.98,6500 C104.1 4510.98,6605.98 C103.2 ; U5.1 5290,4800 C4.2 ; R501.2 5445,5425 5470,5400 ; U6.7 5650,4710 ; v1(5870,5020) R503.2 ; R502.2 5950,5420 v1(5930,5400) 5470,5400 ; U6.1 6290,4800 6380,4710 5650,4710 ; v1(6450,5420) R504.2 ; C2.2@3380,4710 3645,4710 ; 3645,4710 C3.2@4380,4710
  Bottom Layer w24: 2355.7,4750 2340,4750 ; P2.1@2450,6340 P2.1 2450,6460 2480,6490 2802.24,6490 3025.3,6266.94 3624.7,6266.94 3700,6342.24 ICSP.2 3700,6430 3730,6460 v1(4180,6460) 4335,6305 ; U3.7 2644.3,4800 2570.3,4726 2529.7,4726 2505.7,4750 2340,4750 ; 2695,3335 2550,3335 2110,3775 2110,4750 ; 2700,3335 T1.1 2900,3320 2970,3250 3844.53,3250 T2.1@3907.26,3312.74 ; v1(3650,5890) 3744,5890 ; v1(3740,5430) 3744,5430 3744,5690 ; 3744,5914 3744,5890 ; 3749,5919 3985,6155 4335,6155 ; 3815,3250 4820,3250 ; T2.1@3880,3335 3965,3250 ; v1(4140,5690) 3744,5690 ; v1(4550,6110) 4505,6155 4335,6155 ; 4815,3250 T3.1 4985,3250 5815,3250 T4.1 ; v1(5870,5020) 5930,5080 v1(5930,5400) 6430,5400 v1(6450,5420) ; 2110,4750 2340,4750 ; 2110,4750 2110,6520 2385,6795 4060,6795 v1(4335,6520) 4335,6305 ; 3744,5690 3744,5890 ; 4335,6155 4335,6305
pads on no net: BT1. P1.4 P2.4 S503.1 S503.M S504.1 S504.M U6.9

## Keep-outs
Keep-Out Layer:
  lines w10: 2000,3001.97 2000,6937.01 6730.31,6937.01 6730.31,3001.97 2000,3001.97

## Silkscreen, mask and mechanical layers (free items; w line width, h text height)
Top Overlay:
  circle w10: c6455.86,6440 r14.14
  lines w10: 6405.86,6440 ccw(c6455.86,6440) 6505.86,6440 ; 6455.86,6360 6455.86,6390 ; 6455.86,6450 6455.86,6490
  text "Numitron 1.0" at 3666,6800 h60
  text "nocoolnicksleft@gmail.com" at 4406,6800 h60
  text "6-9V" at 6480,6530 h60 r90
  text "UART" at 3530,6410 h60 r90
  text "DCF77" at 2320,6400 h60 r90
  text "0" at 6490,6290 h60 r90
  text "G" at 3180,6240 h60 r90
  text "V" at 2480,6230 h60 r90
  text "G" at 2680,6230 h60 r90
  text "SI" at 2580,6200 h60 r90
  text "TX" at 3080,6180 h60 r90
  text "RX" at 3280,6180 h60 r90
  text "NEXT" at 5370,5940 h60
  text "SET" at 5780,5940 h60
  text "RESET" at 3810,5930 h60
  text "GND" at 3580,5710 h60 r90
  text "32kHz" at 3200,5620 h60

## Text inside footprints (layer, text, board x,y; h text height)
BT1: Top Overlay "+" at 2419.1,5224.36 h60; Top Overlay "2032" at 2315,5070 h60 r90; Top Overlay "3V" at 2405,5070 h60 r90
U101: Top Overlay "1" at 4955.91,6480.91 h59.06; Top Overlay "3" at 5124.09,6480.91 h59.06; Top Overlay "2" at 5030,6480.91 h59.06